# EAGLE board untitled (EAGLE 7.2.0)
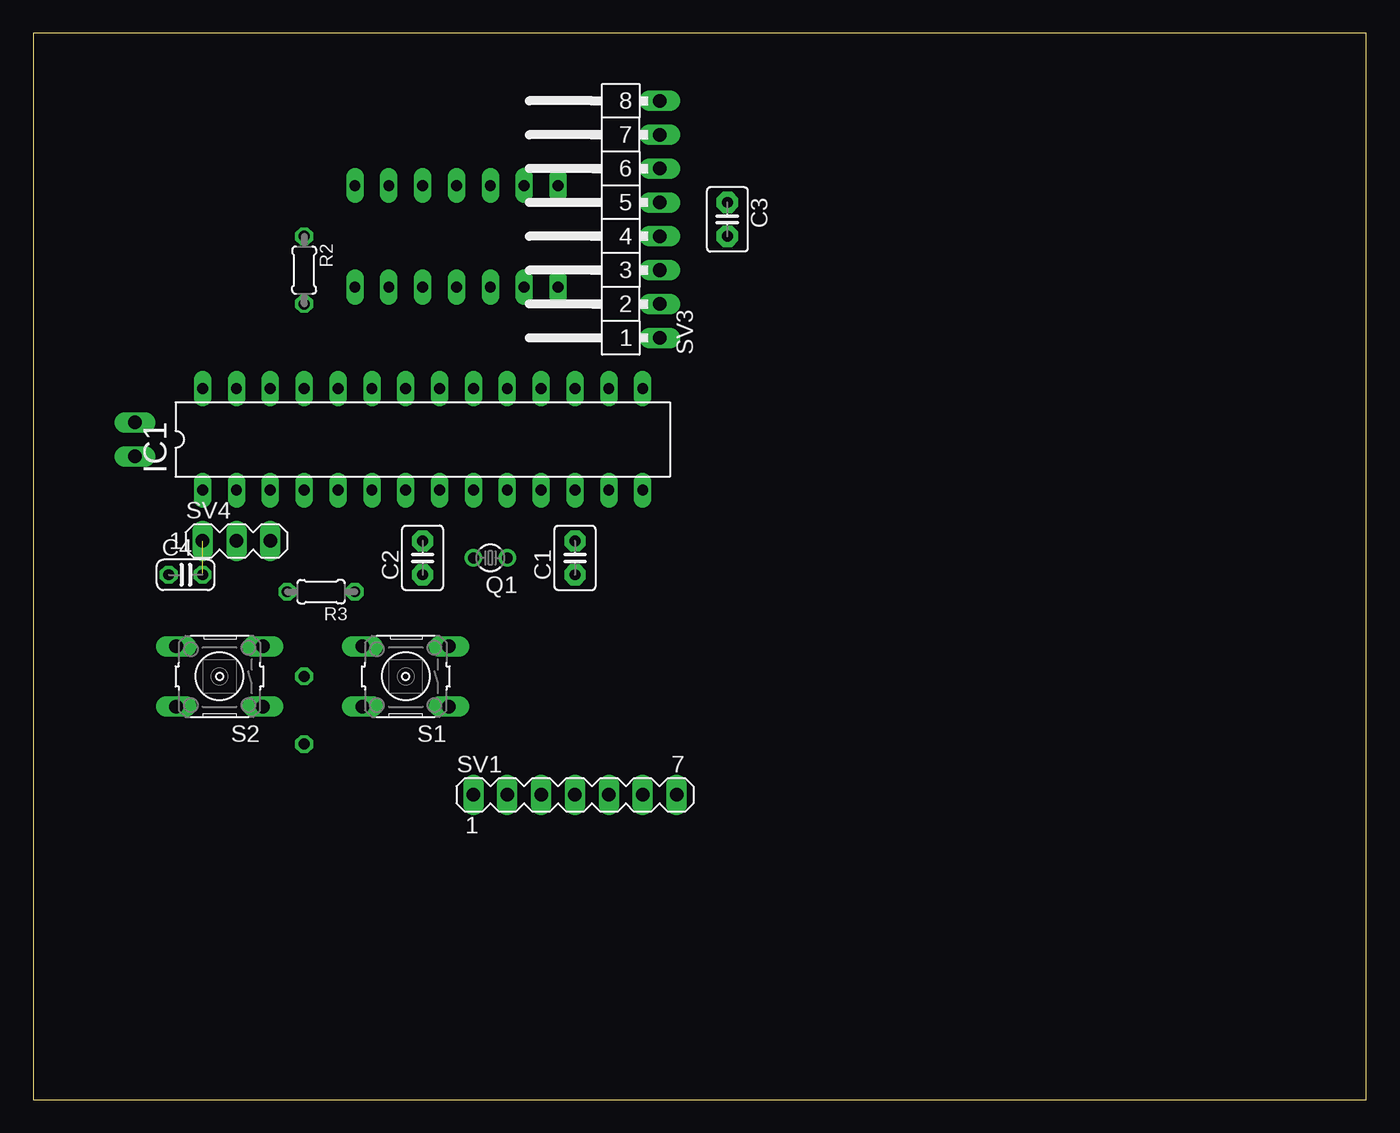
[diagram p0: board, top side]
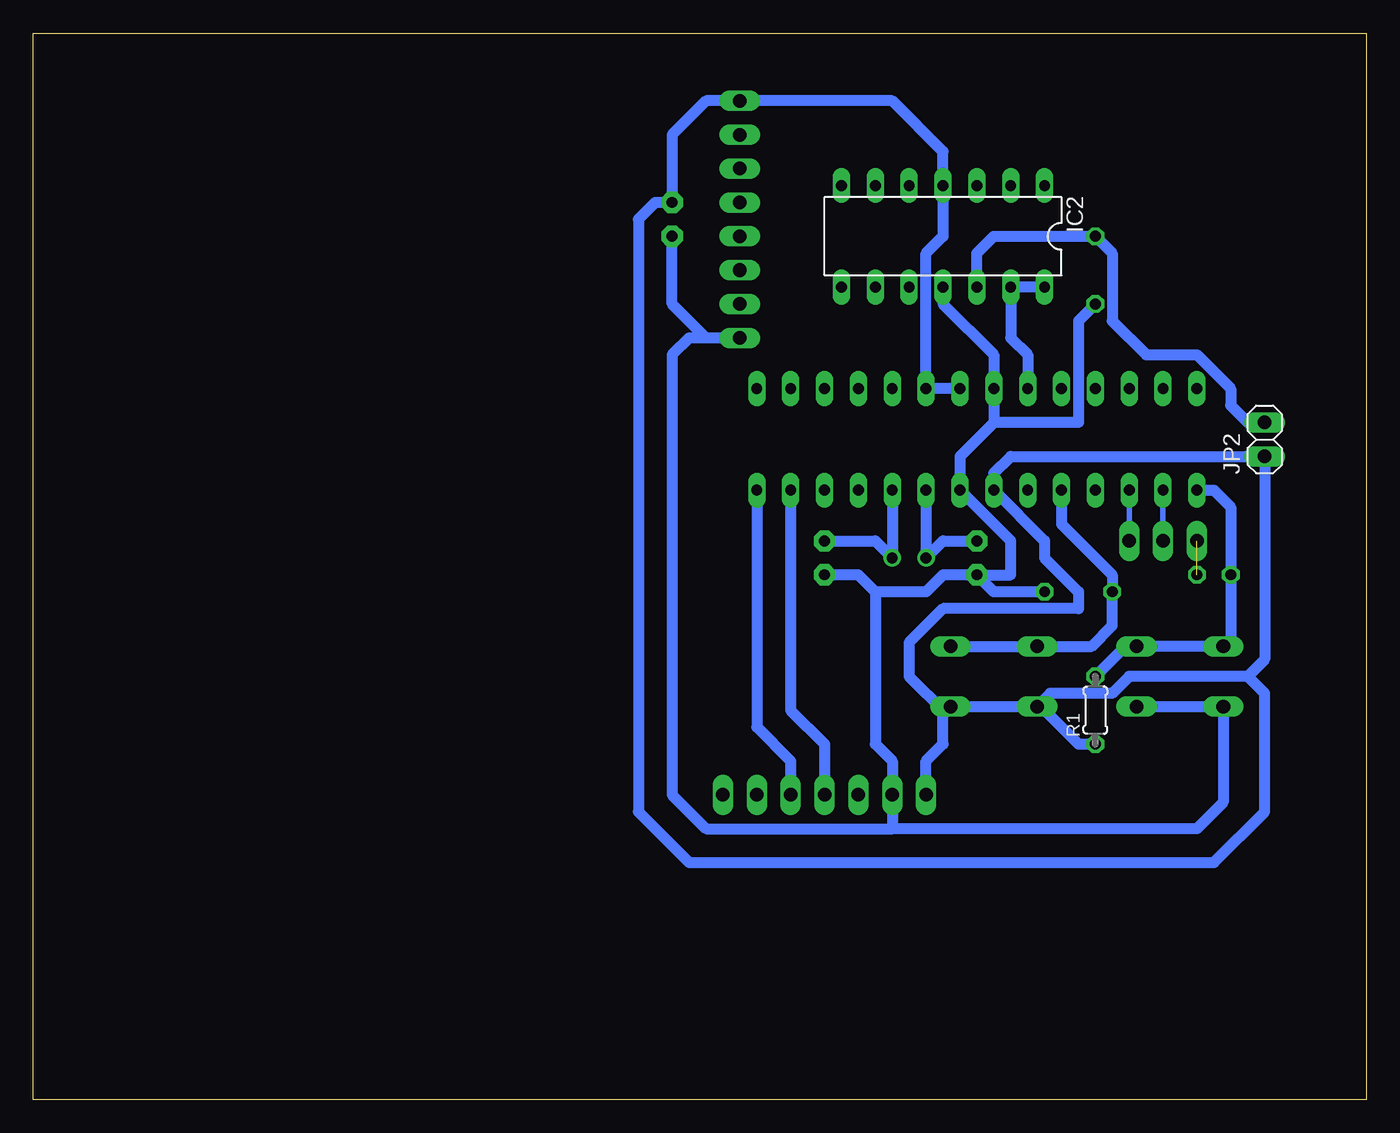
[diagram p1: board, bottom side, seen from below]

Size 100 x 80 mm. Coordinates in mm from the lower left corner, seen from the top.
Outline: 0,0 100,0 100,80 0,80 0,0
Copper layers (1*16): Top 0.035mm / dielectric 1.5mm / Bottom 0.035mm
Design rules "default": minimum track width 10mil, minimum drill 24mil, track to track 8mil, track to pad 8mil, pad to pad 8mil, via to via 8mil, smd to smd 8mil, copper to edge 40mil, drill to drill 8mil, minimum pad ring 10mil, minimum via ring 8mil, stop-mask expansion 4mil, vias tented up to drill 0mil, thermal gap 10mil

## Footprints (pad centres in the part's own frame; a part is rotated, then mirrored left to right if it is on the bottom)
C2.5-3 = drill 0.813 pad 1.6 octagon: 1 -1.27,0; 2 1.27,0
C025-024X044 = drill 0.813 octagon: 1 -1.27,0; 2 1.27,0
DIL28-3 = drill 0.813 long: 1 -16.51,-3.81; 2 -13.97,-3.81; 3 -11.43,-3.81; 4 -8.89,-3.81; 5 -6.35,-3.81; 6 -3.81,-3.81; 7 -1.27,-3.81; 8 1.27,-3.81; 9 3.81,-3.81; 10 6.35,-3.81; 11 8.89,-3.81; 12 11.43,-3.81; 13 13.97,-3.81; 14 16.51,-3.81; 15 16.51,3.81; 16 13.97,3.81; 17 11.43,3.81; 18 8.89,3.81; 19 6.35,3.81; 20 3.81,3.81; 21 1.27,3.81; 22 -1.27,3.81; 23 -3.81,3.81; 24 -6.35,3.81; 25 -8.89,3.81; 26 -11.43,3.81; 27 -13.97,3.81; 28 -16.51,3.81
DIL14 = drill 0.813 long: 1 -7.62,-3.81; 2 -5.08,-3.81; 3 -2.54,-3.81; 4 0,-3.81; 5 2.54,-3.81; 6 5.08,-3.81; 7 7.62,-3.81; 8 7.62,3.81; 9 5.08,3.81; 10 2.54,3.81; 11 0,3.81; 12 -2.54,3.81; 13 -5.08,3.81; 14 -7.62,3.81
1X02 = drill 1.016 long: 1 -1.27,0; 2 1.27,0
TC26V = drill 0.813: 1 -1.27,0; 2 1.27,0
0204/5 = drill 0.813 octagon: 1 -2.54,0; 2 2.54,0
B3F-10XX = drill 1.016 long: 1 -3.251,2.261; 2 3.251,2.261; 3 -3.251,-2.261; 4 3.251,-2.261
MA07-1 = drill 1.016 long: 1 -7.62,0; 2 -5.08,0; 3 -2.54,0; 4 0,0; 5 2.54,0; 6 5.08,0; 7 7.62,0
MA08-1W = drill 1.016 long: 1 -8.89,0; 2 -6.35,0; 3 -3.81,0; 4 -1.27,0; 5 1.27,0; 6 3.81,0; 7 6.35,0; 8 8.89,0
MA03-1 = drill 1.016 long: 1 -2.54,0; 2 0,0; 3 2.54,0

## Placement (x,y rotation side)
C1  [C2.5-3]  40.64,40.64 90 top
C2  [C2.5-3]  29.21,40.64 90 top
C3  [C2.5-3]  52.07,66.04 270 top
C4  [C025-024X044]  11.43,39.37 0 top
IC1  MEGA8-P  [DIL28-3]  29.21,49.53 0 top
IC2  LM324N  [DIL14]  31.75,64.77 180 bottom
JP2  [1X02]  7.62,49.53 90 bottom
Q1  [TC26V]  34.29,40.64 180 top
R1  [0204/5]  20.32,29.21 90 bottom
R2  [0204/5]  20.32,62.23 270 top
R3  [0204/5]  21.59,38.1 180 top
S1  [B3F-10XX]  27.94,31.75 180 top
S2  [B3F-10XX]  13.97,31.75 180 top
SV1  [MA07-1]  40.64,22.86 0 top
SV3  [MA08-1W]  46.99,66.04 90 top
SV4  [MA03-1]  15.24,41.91 0 top

## Library data of the parts
C1-C3 = capacitor-wima
C4 R1-R3 = rcl
IC1 = atmel; OC_FARNELL: unknown; OC_NEWARK: unknown
IC2 = linear
JP2 = pinhead
Q1 = crystal; OC_FARNELL: unknown; OC_NEWARK: unknown
S1 S2 = switch-omron; MPN: B3F-1000; OC_FARNELL: 176432; OC_NEWARK: 36M3542
SV1 SV3 SV4 = con-lstb; OC_FARNELL: unknown; OC_NEWARK: unknown

## Nets
5V: C3.1 IC1.7 IC1.20 IC1.21 IC2.4 JP2.1 R1.1 S1.1 S1.2 SV1.1 SV3.8
GND: C1.1 C2.1 C3.2 IC1.8 IC1.22 IC2.11 R2.2 R3.1 S2.1 S2.2 SV1.2 SV3.1
N$1: IC2.12 JP2.2 R2.1
N$2: C4.2 SV4.1
N$4: IC1.5 R3.2 S1.3 S1.4
N$5: IC1.3 SV4.3
N$7: IC1.2 SV4.2
N$11: IC1.13 SV1.4
N$12: IC1.14 SV1.5
N$14: C2.2 IC1.9 Q1.2
N$15: C1.2 IC1.10 Q1.1
N$16: C4.1 IC1.1 R1.2 S2.3 S2.4
N$18: IC1.23 IC2.13 IC2.14

## Tracks (layer width: path | path; a pad name or v marks a point on that pad's centre or on a via)
5V
  Bottom 0.813: SV1.1 33.02,25.4 31.75,26.67 31.75,28.93 31.61,29.07 | 31.61,29.07 S1.1 S1.2 | S1.2 24.41,29.49 21.59,26.67 R1.1 | 8.89,31.75 7.62,33.02 JP2.1 26.67,48.26 27.94,46.99 IC1.7 24.13,41.91 24.13,40.64 21.59,38.1 21.59,36.83 31.75,36.83 34.29,34.29 34.29,31.75 31.61,29.07 | 8.89,31.75 17.78,31.75 19.05,30.48 23.7,30.48 S1.2 | IC1.21 IC1.20 33.02,63.5 31.75,64.77 IC2.4 31.75,71.12 35.56,74.93 SV3.8 49.53,74.93 52.07,72.39 C3.1 53.34,67.31 54.61,66.04 54.61,21.59 50.8,17.78 11.43,17.78 7.62,21.59 7.62,30.48 8.89,31.75
GND
  Bottom 0.813: S2.1 S2.2 10.72,22.3 12.7,20.32 35.56,20.32 | R2.2 21.59,58.42 21.59,50.8 27.94,50.8 | 27.94,50.8 IC1.22 27.94,55.88 31.75,59.69 IC2.11 | 27.94,50.8 30.48,48.26 IC1.8 26.67,41.91 26.67,39.37 C2.1 | C3.2 52.07,59.69 49.53,57.15 SV3.1 50.8,57.15 52.07,55.88 52.07,22.86 49.53,20.32 35.56,20.32 | 36.83,38.1 38.1,39.37 C1.1 | 35.56,20.32 SV1.2 35.56,25.4 36.83,26.67 36.83,38.1 | R3.1 27.94,38.1 C2.1 | C2.1 31.75,39.37 33.02,38.1 36.83,38.1
N$1
  Bottom 0.813: IC2.12 29.21,63.5 27.94,64.77 R2.1 19.05,63.5 19.05,58.42 16.51,55.88 12.7,55.88 10.16,53.34 10.16,52.07 8.89,50.8 JP2.2
N$2  (1 unrouted)
N$4
  Bottom 0.813: IC1.5 22.86,43.18 19.05,39.37 R3.2 19.05,35.56 20.6,34.01 S1.4 S1.3
N$5
  Bottom 0.406: SV4.3 IC1.3
N$7
  Bottom 0.406: SV4.2 IC1.2
N$11
  Bottom 0.813: IC1.13 43.18,29.21 40.64,26.67 SV1.4
N$12
  Bottom 0.813: IC1.14 45.72,27.94 43.18,25.4 SV1.5
N$14
  Bottom 0.813: IC1.9 Q1.2 31.75,41.91 C2.2
N$15
  Bottom 0.813: C1.2 36.83,41.91 Q1.1 IC1.10
N$16
  Bottom 0.813: IC1.1 11.43,45.72 10.16,44.45 C4.1 10.16,34.57 S2.4 S2.3 18.06,34.01 R1.2
N$18
  Bottom 0.813: IC2.14 IC2.13 26.67,57.15 25.4,55.88 IC1.23